# EAGLE board 3.4 (EAGLE 9.3.0)
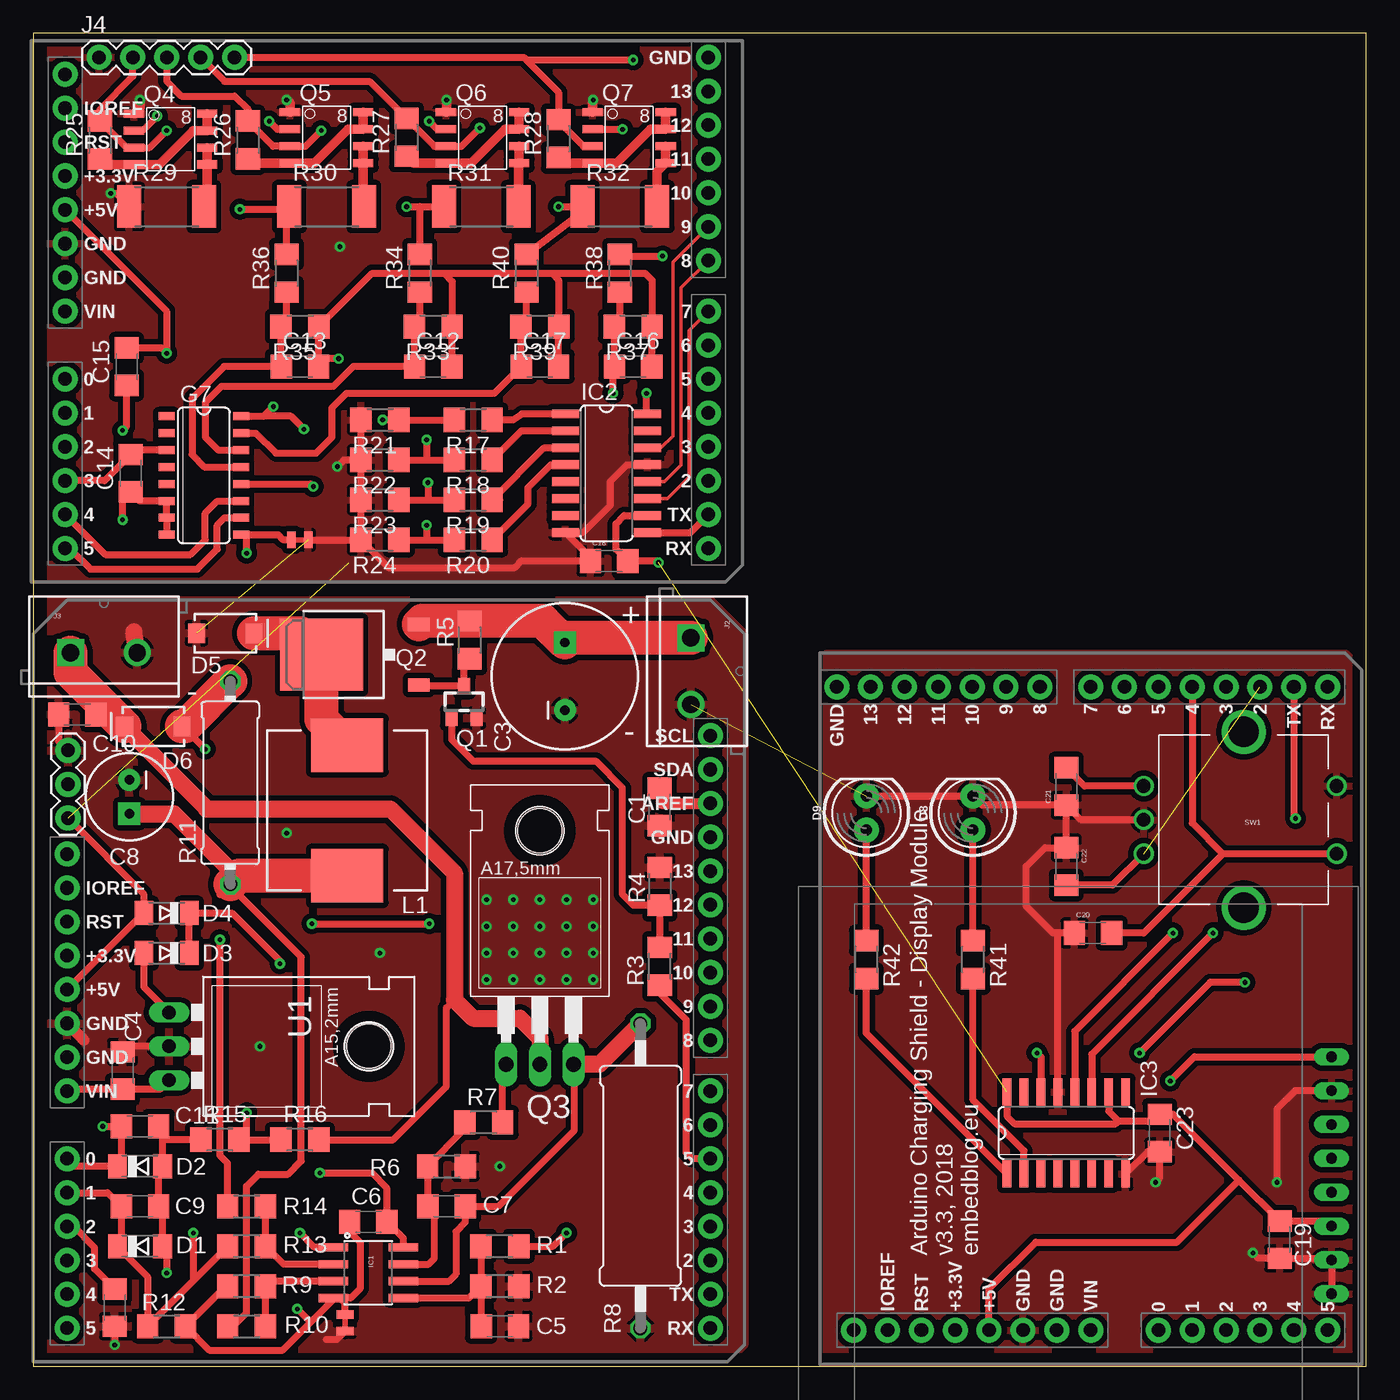
[diagram p0: board, top side]
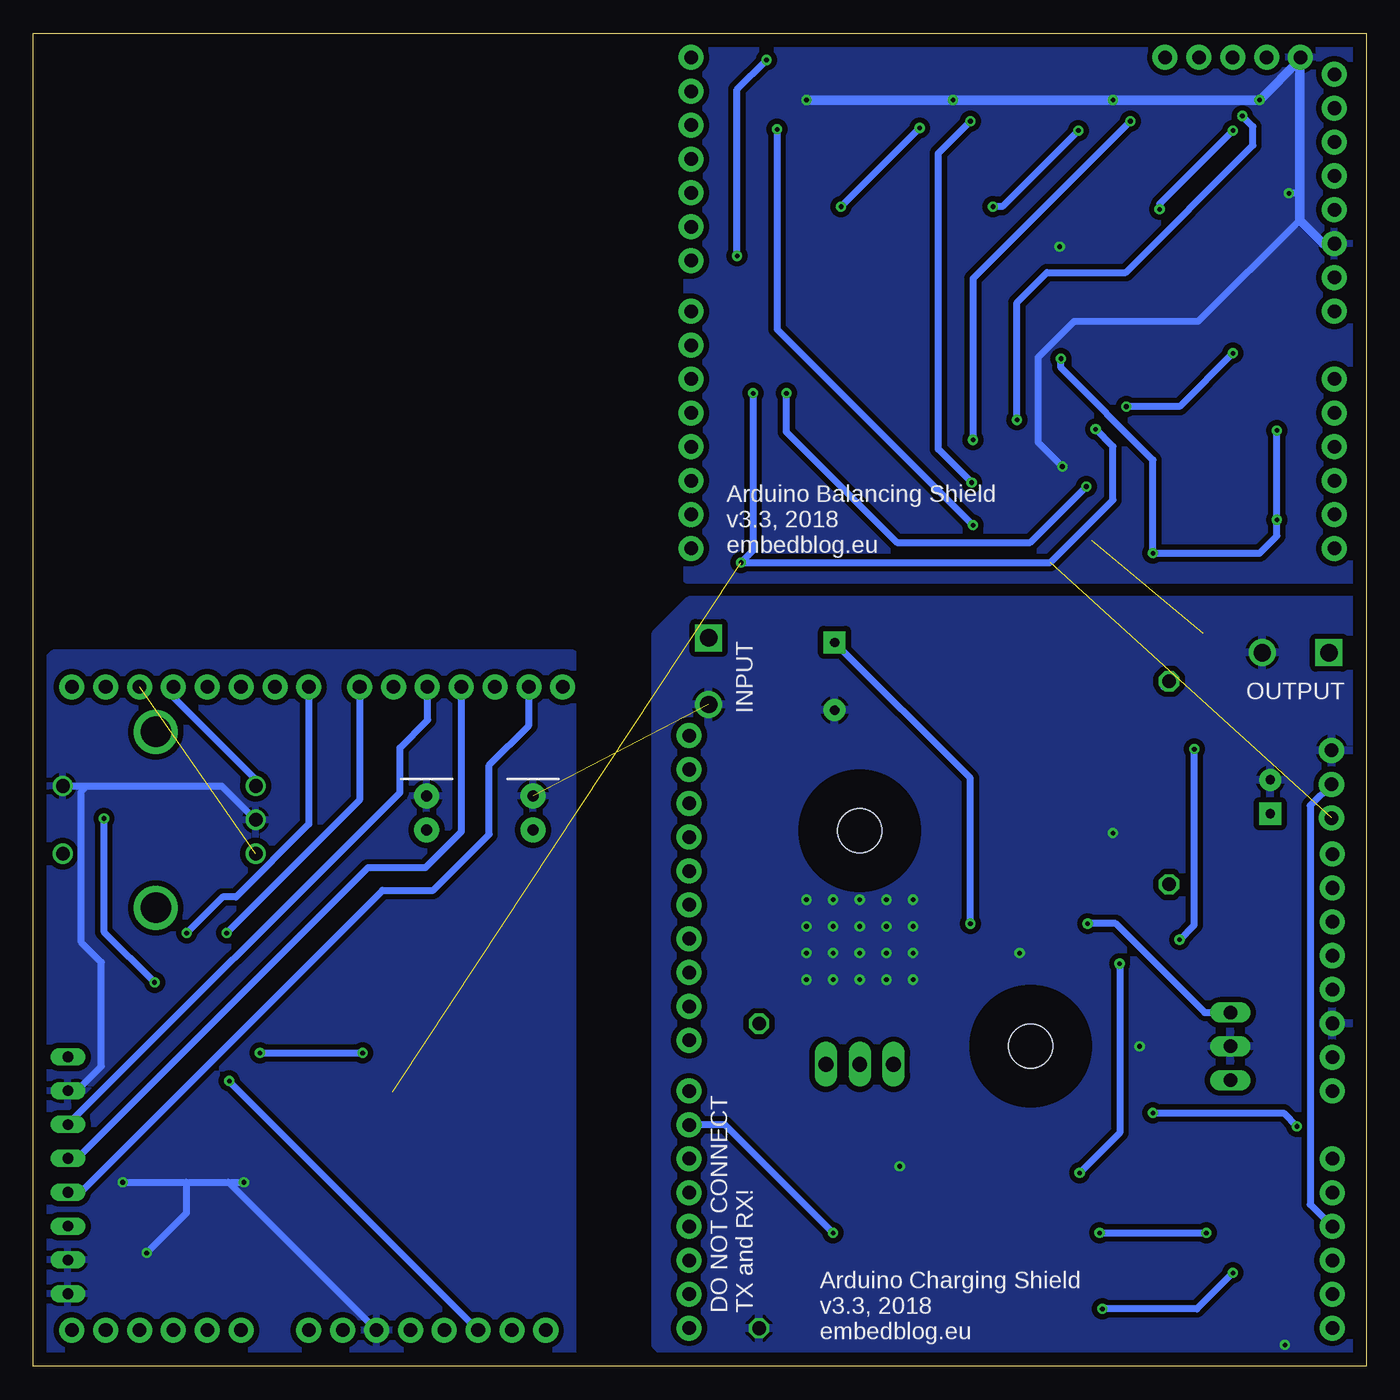
[diagram p1: board, bottom side, seen from below]

Size 100 x 100 mm. Coordinates in mm from the lower left corner, seen from the top.
Outline: 0,0 100,0 100,100 0,100 0,0
Copper layers (1*16): Top 0.035mm / dielectric 1.5mm / Bottom 0.035mm
Design rules "default *": minimum track width 6mil, minimum drill 0.4mm, track to track 6mil, track to pad 6mil, pad to pad 6mil, via to via 6mil, smd to smd 6mil, copper to edge 40mil, drill to drill 6mil, minimum pad ring 10mil, minimum via ring 8mil, stop-mask expansion 4mil, vias tented up to drill 0mil, thermal gap 10mil

## Footprints (pad centres in the part's own frame; a part is rotated, then mirrored left to right if it is on the bottom)
C1206 = smd 1.6 x 1.8: 1 -1.4,0; 2 1.4,0
CPOL-RADIAL-1000UF-25V = drill 0.7 pad 1.651 square: 1 2.54,0 | drill 0.7 pad 1.651: 2 -2.54,0
CPOL-RADIAL-100UF-25V = drill 0.7 pad 1.651 square: 1 1.27,0 | drill 0.7 pad 1.651: 2 -1.27,0
1206 = smd 1.6 x 1.8: 1 -1.4,0; 2 1.4,0
SOD80C = smd 1.4 x 1.8: A 1.7,0; C -1.7,0
MINIMELF = smd 1.4 x 1.8: A 1.7,0; C -1.7,0
SMA-DIODE = smd 1.27 x 1.47: A -2.15,0; C 2.15,0
5110_LAYOUT = drill 0.8 long: CE 0,-5.08; CLK 0,2.54; DC 0,-2.54; DIN 0,0; GND 0,10.16; LIGHT 0,7.62; RST 0,-7.62; VCC 0,5.08
LED_5MM = drill 0.813 pad 1.88: A -1.27,0; K 1.27,0
SO16 = smd 0.6 x 1.2: 1 -4.445,-2.8; 2 -3.175,-2.8; 3 -1.905,-2.8; 4 -0.635,-2.8; 5 0.635,-2.8; 6 1.905,-2.8; 7 3.175,-2.8; 8 4.445,-2.8; 9 4.445,2.8; 10 3.175,2.8; 11 1.905,2.8; 12 0.635,2.8; 13 -0.635,2.8; 14 -1.905,2.8; 15 -3.175,2.8; 16 -4.445,2.8
SO08 = smd 0.61 x 2.21: 1 -1.905,-2.616; 2 -0.635,-2.616; 3 0.635,-2.616; 4 1.905,-2.616; 5 1.905,2.616; 6 0.635,2.616; 7 -0.635,2.616; 8 -1.905,2.616
SO16' = smd 0.66 x 2.032: 1 -4.445,-3.073; 2 -3.175,-3.073; 3 -1.905,-3.073; 4 -0.635,-3.073; 5 0.635,-3.073; 6 1.905,-3.073; 7 3.175,-3.073; 8 4.445,-3.073; 9 4.445,3.073; 10 3.175,3.073; 11 1.905,3.073; 12 0.635,3.073; 13 -0.635,3.073; 14 -1.905,3.073; 15 -3.175,3.073; 16 -4.445,3.073
1X03 = drill 1.016 pad 1.88: 1 0,0; 2 2.54,0; 3 5.08,0
SCREWTERMINAL-5MM-2 = drill 1.3 pad 2.032 square: 1 0,0 | drill 1.3 pad 2.032: 2 5,0
1X05 = drill 1.016 pad 1.88: 1 0,0; 2 2.54,0; 3 5.08,0; 4 7.62,0; 5 10.16,0
CDRH125 = smd 5.4 x 4: 1 0,4.9; 2 0,-4.9
2PT_GND_TIE = smd 1.27 x 0.635: P$1 0,0.635; P$2 0,-0.635
SOT23 = smd 0.9 x 1.2: 1 -0.95,-1.2; 2 0.95,-1.2; 3 0,1.2
TO252 = smd 1 x 1.6: 1 -2.28,-4.8; 2 2.28,-4.8 | smd 5.4 x 6.2: 3 0,2.5
TO220 = drill 1.118 long: 1 -2.54,-6.35; 2 0,-6.35; 3 2.54,-6.35 | hole 3.302: 0,11.176
SO-8 = smd 1.524 x 0.61: 1 -2.743,1.27; 2 -2.743,0; 3 -2.743,-1.27; 4 -2.743,-2.54; 5 2.743,-2.54; 6 2.743,-1.27; 7 2.743,0; 8 2.743,1.27
R1206 = smd 1.6 x 1.803: 1 -1.422,0; 2 1.422,0
0617/22 = drill 1.016 octagon: 1 -11.43,0; 2 11.43,0
0414/15 = drill 1.016 octagon: 1 -7.62,0; 2 7.62,0
R2512 = smd 1.8 x 3.2: 1 -2.8,0; 2 2.8,0
UBC_POWER = drill 1.016 pad 1.88: 3.3V 50.8,26.67; 5V 50.8,29.21; A0 50.8,41.91; A1 50.8,44.45; A2 50.8,46.99; A3 50.8,49.53; A4 50.8,52.07; A5 50.8,54.61; AREF 2.54,15.24; D2 2.54,49.53; D3 2.54,46.99; D4 2.54,44.45; D5 2.54,41.91; D6 2.54,39.37; D7 2.54,36.83; D8 2.54,33.02; D9 2.54,30.48; D10 2.54,27.94; D11 2.54,25.4; D12 2.54,22.86; D13 2.54,20.32; GND@0 50.8,31.75; GND@1 50.8,34.29; GND@2 2.54,17.78; IOREF 50.8,21.59; NC 50.8,19.05; RES 50.8,24.13; RX 2.54,54.61; SCL 2.54,10.16; SDA 2.54,12.7; TX 2.54,52.07; VIN 50.8,36.83
UBC_TOP = drill 1.016 pad 1.88: 3.3V 50.8,26.67; 5V 50.8,29.21; A0 50.8,41.91; A1 50.8,44.45; A2 50.8,46.99; A3 50.8,49.53; A4 50.8,52.07; A5 50.8,54.61; D2 2.54,49.53; D3 2.54,46.99; D4 2.54,44.45; D5 2.54,41.91; D6 2.54,39.37; D7 2.54,36.83; D8 2.54,33.02; D9 2.54,30.48; D10 2.54,27.94; D11 2.54,25.4; D12 2.54,22.86; D13 2.54,20.32; GND@0 50.8,31.75; GND@1 50.8,34.29; GND@2 2.54,17.78; IOREF 50.8,21.59; NC 50.8,19.05; RES 50.8,24.13; RX 2.54,54.61; TX 2.54,52.07; VIN 50.8,36.83
ROTARY_ENC_PLAIN = drill 1.016: A 7.493,-2.54; B 7.493,2.54; C 7.493,0; SW+ -6.985,2.54; SW- -6.985,-2.54 | drill 2.286: P$3 0,6.604; P$4 0,-6.604
78XXL = drill 1.016 long: GND 0,-3.81; IN -2.54,-3.81; OUT 2.54,-3.81 | hole 3.302: 0,11.176

## Placement (x,y rotation side)
C1  100n  [C1206]  46.99,41.96 90 top
C2  100n  [C1206]  6.1,4.4 270 top
C3  1000u  [CPOL-RADIAL-1000UF-25V]  39.88,51.76 90 top
C4  1u  [C1206]  6.7,22.18 270 top
C5  1u  [C1206]  35,3 180 top
C6  100n  [C1206]  25.13,10.83 0 top
C7  100p  [C1206]  31,12 180 top
C8  150u  [CPOL-RADIAL-100UF-25V]  7.2,42.72 270 top
C9  100n  [C1206]  8,12 180 top
C10  100n  [C1206]  3.3,48.9 0 top
C11  100n  [C1206]  8,18 180 top
C12  100n  [C1206]  30,75 0 top
C13  100n  [C1206]  20,75 0 top
C14  100n  [C1206]  7.3,67 90 top
C15  100n  [C1206]  7,75 90 top
C16  100n  [C1206]  45,75 0 top
C17  100n  [C1206]  38,75 0 top
C18  100n  [1206]  43.2,60.4 0 top
C19  1u  [1206]  93.5,9.5 270 top
C20  100n  [1206]  79.5,32.5 0 top
C21  100n  [1206]  77.5,43.5 90 top
C22  100n  [1206]  77.5,37.5 270 top
C23  100n  [1206]  84.5,17.5 90 top
D1  BZT52  [SOD80C]  8,9 0 top
D2  BZT52  [SOD80C]  8,15 0 top
D3  [MINIMELF]  10,31 180 top
D4  [MINIMELF]  10,34 180 top
D5  3A/40V/500mV  [SMA-DIODE]  14.4,55 0 top
D6  3A/40V/500mV  [SMA-DIODE]  9,48 180 top
D7  5110_DISPLAY  [5110_LAYOUT]  97.41,15.59 180 top
D8  [LED_5MM]  70.5,41.5 90 top
D9  [LED_5MM]  62.5,41.5 90 top
G7  74HC4051_MUX  [SO16]  12.79,66.83 270 top
IC1  LMV358SOIC  [SO08]  25.13,7.02 270 top
IC2  74HC595D  [SO16']  43,67 270 top
IC3  74HC595D  [SO16']  77.5,17.5 0 top
J1  455-1750-1-ND  [1X03]  2.6,46.2 270 top
J2  [SCREWTERMINAL-5MM-2]  49.33,54.64 270 top
J3  [SCREWTERMINAL-5MM-2]  2.79,53.53 0 top
J4  [1X05]  4.93,98.19 0 top
L1  56 uH  [CDRH125]  23.56,41.69 0 top
PT1  2PT_GND_TIE  [2PT_GND_TIE]  23.38,3.26 0 top
PT2  2PT_GND_TIE  [2PT_GND_TIE]  20,62 90 top
Q1  2N3904-MMBT  [SOT23]  32.32,49.85 0 top
Q2  FDD4141TO252  [TO252]  24.13,53.39 90 top
Q3  BUZ10  [TO220]  38,29 0 top
Q4  FDS8928A  [SO-8]  10.3,92.7 0 top
Q5  FDS8928A  [SO-8]  22,92.8 0 top
Q6  FDS8928A  [SO-8]  33.7,92.8 0 top
Q7  FDS8928A  [SO-8]  44.7,92.8 0 top
R1  100k  [R1206]  35,9 0 top
R2  100k  [R1206]  35,6 0 top
R3  1k  [R1206]  47,30 270 top
R4  10k  [R1206]  47,36 90 top
R5  470  [R1206]  32.73,54.49 90 top
R6  10k  [R1206]  31,15 180 top
R7  100  [R1206]  33.79,18.29 0 top
R8  1  [0617/22]  45.55,14.27 90 top
R9  15k  [R1206]  16,6 0 top
R10  1k  [R1206]  16,3 180 top
R11  0.1R  [0414/15]  14.78,43.77 90 top
R12  470  [R1206]  10,3 180 top
R13  15k  [R1206]  16,9 0 top
R14  1k  [R1206]  16,12 180 top
R15  10k  [R1206]  14,17 0 top
R16  30k  [R1206]  20,17 0 top
R17  1k  [R1206]  33,71 180 top
R18  1k  [R1206]  33,68 180 top
R19  1k  [R1206]  33,65 180 top
R20  1k  [R1206]  33,62 180 top
R21  10k  [R1206]  26,71 180 top
R22  10k  [R1206]  26,68 180 top
R23  10k  [R1206]  26,65 180 top
R24  10k  [R1206]  26,62 180 top
R25  10k  [R1206]  5,92 90 top
R26  10k  [R1206]  16.1,92 90 top
R27  10k  [R1206]  28,92.2 90 top
R28  10k  [R1206]  39.4,92.1 90 top
R29  8.2  [R2512]  10,87 0 top
R30  8.2  [R2512]  22,87 0 top
R31  8.2  [R2512]  33.6,87 0 top
R32  8.2  [R2512]  44,87 0 top
R33  10k  [R1206]  30,78 180 top
R34  30k  [R1206]  29,82 90 top
R35  10k  [R1206]  20,78 180 top
R36  30k  [R1206]  19,82 90 top
R37  10k  [R1206]  45,78 180 top
R38  30k  [R1206]  44,82 90 top
R39  10k  [R1206]  38,78 180 top
R40  30k  [R1206]  37,82 90 top
R41  1k  [R1206]  70.5,30.5 270 top
R42  1k  [R1206]  62.5,30.5 270 top
S1  UBC_POWER_SHIELD  [UBC_POWER]  53.34,57.47 180 top
S2  UBC_TOP_SHIELD  [UBC_TOP]  53.19,115.97 180 top
S3  UBC_TOP_SHIELD  [UBC_TOP]  42.5,53.5 270 top
SW1  ROTARTY_ENCODER  [ROTARY_ENC_PLAIN]  90.81,40.99 180 top
U1  [78XXL]  14,24 270 top

## Library data of the parts
C1 C2 C4-C7 C9-C17 R1-R42 = resistor
C3 L1 PT1 PT2 = SparkFun-Passives
C8 C18-C23 = SparkFun-Capacitors
D1-D4 = diode
D5 D6 = SparkFun-DiscreteSemi; PROD_ID: DIO-09886
D7 S1-S3 = custom
D8 D9 = SparkFun-LED
G7 = SparkFun-AnalogIC
IC1 = SparkFun-AnalogIC; PROD_ID: IC-09657
IC2 IC3 = 74xx-eu
J1 = SparkFun-Connectors; PROD_ID: XXX-00000
J2 J3 = SparkFun-Connectors; STOREFRONT_ID: PRT-08432
J4 = SparkFun-Connectors
Q1 Q4-Q7 = m-pad-2.1
Q2 Q3 = transistor-fet
SW1 = SparkFun-Electromechanical
U1 = SparkFun-PowerIC

## Nets
5V: C15.2 C18.2 C19.1 C23.2 D4.A D7.VCC G7.16 IC2.10 IC2.16 IC3.10 IC3.16 J1.3 S1.5V S2.5V S3.5V
+12V: C4.2 S1.VIN U1.OUT
A2: C2.1 J1.2 S1.A2
AGND: C6.1 C9.1 C11.1 D1.A D2.A IC1.4 PT1.P$1 R9.1 R12.1 R15.1
ASW_OUT: C14.2 G7.3 S2.A3
ASW_SW0: G7.11 S2.A4
ASW_SW1: G7.10 S2.A5
BAL_C0: IC2.1 R17.1
BAL_C1: IC2.2 R18.1
BAL_C2: IC2.3 R19.1
BAL_C3: IC2.4 R20.1
BTN: C20.2 S3.D4 SW1.SW+
CELL0: J4.2 Q4.3 R25.2 R30.1 R36.2
CELL0ADC: C13.1 G7.13 R35.2 R36.1
CELL1: J4.3 Q5.3 R26.2 R31.1 R34.2
CELL1ADC: C12.1 G7.14 R33.2 R34.1
CELL2: J4.4 Q6.3 R27.2 R32.1 R40.2
CELL2ADC: C17.1 G7.15 R39.2 R40.1
CELL3: J4.5 Q7.3 R28.2 R38.2
CELL3ADC: C16.1 G7.12 R37.2 R38.1
CLK: IC2.11 S2.D7
CLK1: IC3.11 S3.D7
DAT: IC2.14 S2.D9
DAT1: IC3.14 S3.TX
DAT_OUT: IC2.9 S2.TX
ENC1: C22.2 S3.D2 SW1.B
ENC2: C21.2 S3.D3 SW1.A
FBI: C9.2 D1.C IC1.1 R12.2 R13.1 S1.A1
FBV: C11.2 D2.C R15.2 R16.1 S1.A0
GND: C1.1 C2.2 C3.2 C4.1 C5.1 C8.2 C10.1 C18.1 C19.2 C20.1 C21.1 C22.1 C23.1 D5.A D7.CE D7.GND D7.LIGHT D8.K D9.K IC2.8 IC2.13 IC3.8 IC3.13 J1.1 J2.2 J3.2 J4.1 PT1.P$2 PT2.P$2 Q1.2 Q4.1 Q5.1 Q6.1 Q7.1 R2.2 R4.2 R6.1 R8.1 R21.2 R22.2 R23.2 R24.2 R29.1 S1.GND@0 S2.GND@0 S3.GND@0 SW1.C SW1.SW- U1.GND
GNDA: C12.2 C13.2 C14.1 C15.1 C16.2 C17.2 G7.6 G7.7 G7.8 G7.9 PT2.P$1 R33.1 R35.1 R37.1 R39.1
LCD_DC: D7.DC S3.D10
LCD_RST: D7.RST S3.RES
LOAD: IC2.12 S2.D8
LOAD1: IC3.12 S3.D8
N$2: Q4.2 R17.2 R21.1
N$3: Q4.5 Q4.6 R29.2
N$4: Q5.2 R18.2 R22.1
N$5: Q5.4 Q5.7 Q5.8 R26.1
N$6: C8.1 L1.2 R10.2 R11.1
N$7: C1.2 S1.AREF
N$8: Q5.5 Q5.6 R30.2
N$9: Q6.2 R19.2 R23.1
N$10: IC1.3 R9.2 R10.1
N$11: IC1.2 R13.2 R14.1
N$12: Q6.4 Q6.7 Q6.8 R27.1
N$13: Q6.5 Q6.6 R31.2
N$14: D5.C L1.1 Q2.3
N$15: D6.A R11.2 R14.2
N$16: IC3.1 R42.2
N$17: Q7.2 R20.2 R24.1
N$18: Q7.4 Q7.7 Q7.8 R28.1
N$19: Q7.5 Q7.6 R32.2
N$20: Q4.4 Q4.7 Q4.8 R25.1
N$21: C7.2 IC1.7 R6.2 R7.1
N$23: Q1.3 Q2.1 R5.1
N$24: Q3.1 R7.2
N$25: C7.1 IC1.6 Q3.3 R8.2
N$26: C5.2 IC1.5 R1.1 R2.1
N$27: IC3.2 R41.2
N$28: D9.A R42.1
N$29: D8.A R41.1
N$31: Q1.1 R3.1 R4.1
OASUP: C6.2 D3.C D4.C IC1.8
PWM_CHRG: R3.2 S1.D5
PWM_LOAD: R1.2 S1.D6
SPI_CLK: D7.CLK S3.D13
SPI_MOSI: D7.DIN S3.D11
V_BATT: C10.2 D6.C J3.1 Q3.2 R16.2
VIN: C3.1 D3.A J2.1 Q2.2 R5.2 U1.IN

## Tracks (layer width: path | path; a pad name or v marks a point on that pad's centre or on a via)
5V  (via drill 0.35)  (2 unrouted)
  Top 0.508: S1.5V 8.28,34 | 8.28,34 D4.A | IC2.10 44.33,63.83 43.7,63.2 43.7,61.3 C18.2 46.8,60.4 v46.9,60.3 | S2.5V 10,79.15 v10,76 9.6,76.4 C15.2 | G7.16 17.27,71.28 | 17.27,71.28 v18,72 | IC2.16 46,71.52 v46,73 | v20.3,70.3 19.32,71.28 17.27,71.28 | J1.3 8.28,35.44 8.28,34 | D7.VCC 97.02,10.9 C19.1 90.45,13.95 | 90.45,13.95 85.5,18.9 C23.2 84,18.4 81.4,18.4 | IC3.10 80.67,19.12 81.4,18.4 | IC3.16 73.06,18.75 73.6,18.2 81.2,18.2 81.4,18.4 | S3.5V 71.71,5.81 75.2,9.3 85.8,9.3 90.45,13.95
  Bottom 0.508: v10,76 14,72 v18,72 | v46,73 46,61.2 v46.9,60.3 23.7,60.3 19,65 19,69 v20.3,70.3
+12V
  Top 0.508: U1.OUT 9.51,20.78 C4.2 2.68,20.78 S1.VIN
A2
  Top 0.508: C2.1 4.6,7.3 4.6,8.9 3.02,10.48 S1.A2
  Bottom 0.508: J1.2 4.2,42.06 4.2,12.14 S1.A2
AGND  (via drill 0.35)
  Top 0.508: 9.7,17 D2.A 9.4,14.7 C9.1 9.7,11.7 D1.A 10,8.7 v10,7 | 9.7,17 9.7,17.7 C11.1 | R15.1 9.7,17 | R9.1 14.42,6 R12.1 13.21,1.21 18.71,1.21 20.85,3.35 | C6.1 23.73,10.07 24.5,9.3 24.5,5.8 23.8,5.1 23.79,5.12 23,5.12 | 23,5.12 22.6,5.12 | 22.6,5.12 IC1.4 | 20.85,3.35 22.6,5.1 22.6,5.12 | v19.8,4.3 20.75,3.35 20.85,3.35 | PT1.P$1 23.38,4.74 23,5.12
  Bottom 0.508: v10,7 12.7,4.3 v19.8,4.3
ASW_OUT
  Top 0.508: G7.3 7.63,68.73 C14.2 5.34,66.44 S2.A3
ASW_SW0
  Top 0.508: S2.A4 5.39,60.9 11.8,60.9 12.9,62 12.9,64 13.8,64.9 15.56,64.9 G7.11
ASW_SW1
  Top 0.508: S2.A5 2.74,61.36 4.3,59.8 12.3,59.8 13.8,61.3 13.8,63.1 14.36,63.66 G7.10
BAL_C0
  Top 0.508: IC2.1 36.66,71.44 36,71 R17.1
BAL_C1
  Top 0.508: IC2.2 36.6,70.17 R18.1
BAL_C2
  Top 0.508: 35,65 R19.1 38.33,68.91 IC2.3
BAL_C3
  Top 0.508: R20.1 37.1,64.68 37.1,65.9 38.84,67.64 IC2.4
BTN
  Top 0.508: SW1.SW+ 89.25,38.45 | 89.25,38.45 83.3,32.5 C20.2 | S3.D4 86.95,40.75 89.25,38.45
CELL0  (via drill 0.35)
  Top 0.508: J4.2 7.47,96.77 5,94.3 R25.2 6.99,91.43 Q4.3 8.73,91.43 v10,92.7 | v15.5,86.8 19,86.8 | 19,86.8 R30.1 | R36.2 19,86.8
  Bottom 0.508: v10,92.7 15.5,87.2 v15.5,86.8
CELL0ADC
  Top 0.508: R36.1 19,77.42 R35.2 18.6,76.98 C13.1 14.3,75 11.9,72.6 11.9,68.4 12.84,67.47 G7.13
CELL1  (via drill 0.35)
  Top 0.508: J4.3 10.01,96.39 11.1,95.3 15.1,95.3 16.1,94.3 R26.2 17.99,91.53 Q5.3 20.43,91.53 v21.6,92.7 | v28,87 29,87 | 29,87 R31.1 | R34.2 29,87
  Bottom 0.508: v21.6,92.7 27.3,87 v28,87
CELL1ADC
  Top 0.508: R34.1 29,77.42 R33.2 28.6,76.98 C12.1 24,75 22.5,73.5 14.1,73.5 12.9,72.3 12.9,69.7 13.87,68.73 G7.14
CELL2  (via drill 0.35)
  Top 0.508: J4.4 14.34,96.4 25.22,96.4 R27.2 30.09,91.53 Q6.3 32.13,91.53 v33.5,92.9 | v39.4,87 R32.1 41.2,86.62 R40.2
  Bottom 0.508: v33.5,92.9 v39.4,87
CELL2ADC
  Top 0.508: R40.1 37,77.42 R39.2 36.6,76.98 C17.1 34.6,73 23.5,73 22.4,71.9 22.4,69.7 21.2,68.5 18.2,68.5 16.7,70 G7.15
CELL3  (via drill 0.35)
  Top 0.508: Q7.3 41.27,91.53 39.4,93.4 R28.2 39.4,95.6 37,98 | J4.5 36.81,98.19 37,98 | R38.2 44.88,83.3 v47.2,83.3 | v45,98 37,98
  Bottom 0.508: v47.2,83.3 47.2,95.8 v45,98
CELL3ADC  (via drill 0.35)
  Top 0.508: R38.1 44,77.42 R37.2 43.6,76.98 C16.1 43.5,74.9 v43.5,73 | G7.12 20.8,66.19 v21,66
  Bottom 0.508: v43.5,73 43.5,70.1 35.2,61.8 25.2,61.8 v21,66
CLK
  Top 0.254: IC2.11 47.59,65.09 49.2,66.7 49.2,77.69 S2.D7
CLK1  (via drill 0.35)
  Top 0.508: v88.5,32.5 79.41,23.41 IC3.11
  Bottom 0.508: S3.D7 79.33,40.67 84.8,35.2 85.8,35.2 v88.5,32.5
DAT
  Top 0.254: S2.D9 48,82.84 48,69.8 47.1,68.9 47.09,68.91 IC2.14
DAT1  (via drill 0.35)
  Top 0.508: S3.TX 94.57,41.23 v94.7,41.1 | v90.9,28.8 88.3,28.8 v83,23.5 | v75.3,23.5 75.59,23.2 IC3.14
  Bottom 0.508: v94.7,41.1 94.7,32.6 v90.9,28.8 | v83,23.5 v75.3,23.5
DAT_OUT
  Top 0.508: IC2.9 49.3,62.55 S2.TX
ENC1  (1 unrouted)
  Top 0.508: SW1.B 80.96,36.1 C22.2
ENC2
  Top 0.508: SW1.A 78.87,43.53 C21.2
  Bottom 0.508: S3.D3 89.49,50.19 83.31,44.01 SW1.A
FBI  (via drill 0.35)
  Top 0.508: S1.A1 5.58,13.02 C9.2 6.6,9.3 D1.C 8.58,6.72 R12.2 12,6.42 | 12,6.42 R13.1 | IC1.1 21.07,8.93 v20,10 | v12,10 12,6.42
  Bottom 0.508: v20,10 v12,10
FBV  (via drill 0.35)
  Top 0.508: S1.A0 3.1,15 D2.C 6.6,15.3 C11.2 v5.2,18 | R16.1 R15.2 16,17.58 v16,19
  Bottom 0.508: v16,19 6.2,19 v5.2,18
GND  (via drill 0.35)  (2 unrouted)
  Top 0.508: U1.GND 7.12,24 C4.1 | PT1.P$2 22.76,2 22,2 | R24.2 R23.2 R22.2 | R22.2 R21.2 | PT2.P$2 R24.2 | v5.8,88 6.2,88 R29.1 | R24.2 26.68,59.9 36.1,59.9 36.6,60.4 C18.1 41.8,60.68 IC2.8 41.26,62.55 43.3,64.6 43.3,66.4 44.53,67.64 IC2.13 | R22.2 23.3,68 v22.8,67.5 | C10.1 1.9,46.9 J1.1 | C2.2 v6.1,1.6 | IC3.8 83.62,16.1 C23.1 84.5,14.1 v84.2,13.8 | D9.K D8.K 71.17,42.1 C21.1 | C21.1 C22.1 75.9,38.9 74.5,37.5 74.5,34.5 76.5,32.5 76.9,32.5 | C20.1 76.9,32.5 | IC3.13 76.86,32.47 76.9,32.5 | D7.CE 94.67,20.67 93.3,19.3 v93.3,13.8 | D7.GND D7.LIGHT 97.28,8.1 C19.2 91.9,8.1 v91.5,8.5 | SW1.C 78.61,40.99 C21.1
  Top 0.7: v8,95 8,94.41 Q4.1 | v19,95 19.26,94.74 Q5.1 | v31,95 31,94.11 Q6.1 | v42,95 41.96,94.96 Q7.1
  Top 0.813: S1.GND@0 3.81,24.45
  Top 1.27: J3.2 7.54,55.1
  Bottom 0.508: 5,88 v5.8,88 | v22.8,67.5 24.6,69.3 24.6,75.7 21.9,78.4 12.6,78.4 5,86 | SW1.SW- 96,43.53 | 96,43.53 85.85,43.53 SW1.C | v93.3,13.8 88.5,13.8 | 88.5,13.8 85.35,13.8 | 85.35,13.8 v84.2,13.8 | v91.5,8.5 88.5,11.5 88.5,13.8 | D7.CE 97.38,20.7 96.7,20.7 94.9,22.5 94.9,30.3 96.4,31.8 96.4,43.13 96,43.53 | S3.GND@0 85.35,13.8
  Bottom 0.7: v42,95 v31,95 v19,95 v8,95 4.93,98.07 J4.1 5,98.12 5,88 5,86 3.22,84.22 S2.GND@0
  other vias: 35,15 17,24 34,35 34,33 34,31 34,29 36,35 36,33 36,31 36,29 38,35 38,33 38,31 38,29 40,35 40,33 40,31 40,29 42,35 42,33 42,31 42,29 19,40 26,31 23,84
  pour Bottom (isolate 0.406): 0,57.47 50.8,57.47 53.34,54.93 53.34,1.59 52.07,0.32 0,0.32
  pour Top (isolate 0.406): 0,57.47 50.8,57.47 53.34,54.93 53.34,1.59 52.07,0.32 0,0.32
  pour Top (isolate 0.406): 0,100 51,100 51,59 0,59
  pour Bottom (isolate 0.406): 0,100 51,100 51,59 0,59
  pour Bottom (isolate 0.406): 99.5,0.5 59.5,0.5 59.5,53.5 98.5,53.5 99.5,52.5
  pour Top (isolate 0.406): 59.5,0.5 59.5,53.5 98.5,53.5 99.5,52.5 99.5,0.5
GNDA  (via drill 0.35)
  Top 0.508: 30.8,82 25.42,82 R35.1 21.4,76.98 C13.2 22,75.6 v22.9,75.6 | 30.8,82 31.42,81.38 R33.1 31.4,76.98 C12.2 | 30.8,82 38.9,82 | 38.9,82 39.42,81.48 R39.1 39.4,76.98 C17.2 | 38.9,82 45.9,82 46.42,81.48 R37.1 46.4,76.98 C16.2 | G7.9 16,62.38 | 16,62.38 18.37,62.38 18.75,62 PT2.P$1 | v16,61 16,62.38 | G7.8 G7.7 9.99,64.88 10.02,64.9 G7.6 7.97,64.92 C14.1 6.7,65 v6.7,63.5 | v6.7,70.2 7,70.5 C15.1
  Bottom 0.508: v22.9,75.6 22.9,74.9 16,68 v16,61 8,61 6.7,62.3 v6.7,63.5 v6.7,70.2
LCD_DC
  Bottom 0.508: D7.DC 72.5,43.04 72.5,46.4 70.4,48.5 70.4,50.92 S3.D10
LCD_RST  (via drill 0.35)
  Top 0.508: v85.3,21.4 87.11,23.21 D7.RST
  Bottom 0.508: S3.RES 85.3,21.37 v85.3,21.4
LOAD
  Top 0.254: IC2.12 47.37,66.36 48.6,67.6 48.6,80.9 S2.D8
LOAD1  (via drill 0.35)
  Top 0.508: v85.5,32.5 78.14,25.14 IC3.12
  Bottom 0.508: S3.D8 75.52,42.48 v85.5,32.5
N$2  (via drill 0.35)
  Top 0.508: R17.2 R21.1 v26.2,71 | v9.3,93.8 8.2,92.7 Q4.2
  Bottom 0.508: v9.3,93.8 8.5,93 8.5,91.6 18.05,82.05 23.95,82.05 26.2,79.8 v26.2,71
N$3
  Top 0.7: Q4.6 Q4.5 13.04,86.74 12.8,86.5 R29.2
N$4  (via drill 0.35)
  Top 0.508: R22.1 29.6,68 | 29.6,68 R18.2 | Q5.2 18.3,92.8 v17.7,93.4 | v29.5,69.5 29.5,68.1 29.6,68
  Bottom 0.508: v17.7,93.4 29.5,81.6 v29.5,69.5
N$5
  Top 0.7: Q5.8 Q5.7 23.6,92.8 21.06,90.26 Q5.4 16.42,90.26 R26.1
N$6
  Top 0.508: R10.2 15,3 16,4 16,13.5 16.9,14.4 19.1,14.4 20.1,15.4 20.1,30.7 14.71,36.09 | 14,35.37 14.71,36.09 | 14.71,36.09 15.42,36.79
  Top 1.27: C8.1 10.55,41.45 14.78,37.22 R11.1
  Top 2.54: L1.2 15.42,36.79 R11.1
N$7
  Top 0.813: C1.2 47.12,42.23 S1.AREF
N$8
  Top 0.7: Q5.6 Q5.5 24.74,87.06 R30.2
N$9  (via drill 0.35)
  Top 0.508: R23.1 29.6,65 | 29.6,65 R19.2 | Q6.2 30.3,92.8 v29.7,93.4 | v29.6,66.3 29.6,65
  Bottom 0.508: 29.7,66.4 v29.6,66.3 32.1,68.8 32.1,91 v29.7,93.4
N$10
  Top 0.508: R10.1 R9.2 17.81,6.38 IC1.3
N$11
  Top 0.508: R14.1 R13.2 18.77,7.66 IC1.2
N$12
  Top 0.7: Q6.8 Q6.7 35.4,92.8 32.86,90.26 Q6.4 28.52,90.26 R27.1
N$13
  Top 0.7: Q6.6 Q6.5 36.4,90.22 R31.2
N$14
  Top 2.54: L1.1 21.63,48.52 Q2.3 20.02,55 D5.C
N$15  (via drill 0.35)
  Top 0.508: R14.2 14.58,15.22 14,15.8 v14,32 | v12.9,46.3 11.39,47.81 11.39,48
  Top 2.54: R11.2 11.39,48 D6.A
  Bottom 0.508: 15.2,50.97 R11.2 | v14,32 12.9,33.1 v12.9,46.3
N$16
  Top 0.508: IC3.1 62.5,24.98 R42.2
N$17  (via drill 0.35)
  Top 0.508: R24.1 29.6,62 | 29.6,62 R20.2 | Q7.2 v44.2,92.8 | v29.5,63.1 29.5,62.1 29.6,62
  Bottom 0.508: v44.2,92.8 44.2,77.8 v29.5,63.1
N$18
  Top 0.7: Q7.8 Q7.7 46.3,92.8 43.76,90.26 Q7.4 39.82,90.26 R28.1
N$19
  Top 0.7: Q7.6 Q7.5 46.8,89.62 R32.2
N$20
  Top 0.7: R25.1 5.42,90.16 Q4.4 9.46,90.16 12,92.7 Q4.7 Q4.8
N$21
  Top 0.508: IC1.7 29.66,7.66 30.1,8.1 30.1,11.5 C7.2 29.6,14.98 R6.2 32.37,17.79 R7.1
N$23
  Top 0.508: R5.1 32.32,52.66 Q1.3 28.99,51.05 Q2.1
N$24
  Top 0.508: R7.2 35.21,22.4 Q3.1
N$25
  Top 0.508: IC1.6 31.18,6.38 31.7,6.9 31.7,10.1 32.4,10.8 C7.1 34.9,12 40.6,17.7 40.6,22.59 Q3.3
  Top 1.27: R8.2 42.5,22.65 Q3.3
N$26
  Top 0.508: R1.1 R2.1 | R2.1 33.58,3.02 C5.2 | IC1.5 32.69,5.12 R2.1
N$27
  Top 0.508: IC3.2 74.33,16.18 70.5,20 R41.2
N$28
  Top 0.508: R42.1 D9.A
N$29
  Top 0.508: R41.1 D8.A 70.5,40.5
N$31
  Top 0.508: Q1.1 31.4,48.62 31.4,47 33,45.4 42.2,45.4 44.2,43.4 44.2,35.4 45.02,34.58 R4.1 R3.1
OASUP  (via drill 0.35)
  Top 0.508: D3.C D4.C 14.9,34 18.5,30.4 v18.5,30.2 | IC1.8 27.75,9.61 C6.2 26.5,10.86 26.5,13.4 25.4,14.5 v21.5,14.5
  Bottom 0.508: v18.5,30.2 18.5,17.5 v21.5,14.5
PWM_CHRG
  Top 0.508: S1.D5 49.44,15.56 49,16 49,26 46.42,28.58 R3.2
PWM_LOAD  (via drill 0.35)
  Top 0.508: R1.2 39,9 v40,10
  Bottom 0.508: v40,10 48.1,18.1 S1.D6
SPI_CLK
  Bottom 0.508: D7.CLK 96.45,13.05 73.8,35.7 70,35.7 65.8,39.9 65.8,45.1 62.82,48.08 S3.D13
SPI_MOSI
  Bottom 0.508: S3.D11 67.9,40.1 70.6,37.4 74.9,37.4 96.71,15.59 D7.DIN
V_BATT
  Top 0.508: R16.2 27,17 31,21 31,26.9 31.6,27.5 | C10.2 5.95,48.9 D6.C
  Top 1.27: D6.C 13,41.85 13,41.8 26.8,41.8 31.6,37 31.6,27.5 33,26.1 36.5,26.1 38,24.6 Q3.2
  Top 2.54: D6.C 2.79,52.06 J3.1
VIN  (via drill 0.35)
  Top 0.508: U1.IN 8.3,28.43 D3.A | v20.9,33.2 v29.7,33.2
  Top 2.54: J2.1 40.22,54.64 C3.1 38.26,55.91 R5.2 29.17,55.91 Q2.2
  Bottom 0.508: U1.IN 12.12,26.54 18.79,33.21 v20.89,33.21 v20.9,33.2 | v29.7,33.2 29.7,44.12 C3.1

## Text on the board
tNames: + | - | - | Arduino Charging Shield - Display Module / v3.3, 2018 / embedblog.eu
bNames: Arduino Balancing Shield / v3.3, 2018 / embedblog.eu | OUTPUT | INPUT | DO NOT CONNECT / TX and RX! | Arduino Charging Shield / v3.3, 2018 / embedblog.eu